# Altium PCB SlowDanceGift.PcbDoc
Units mm, origin at the board's own origin, x right, y up, seen from the top; angles counter-clockwise.
Board outline 57.5 x 36 mm, 2 copper layers (Top Layer, Bottom Layer); 69 components, 46 nets, 221 pads, 29 vias.
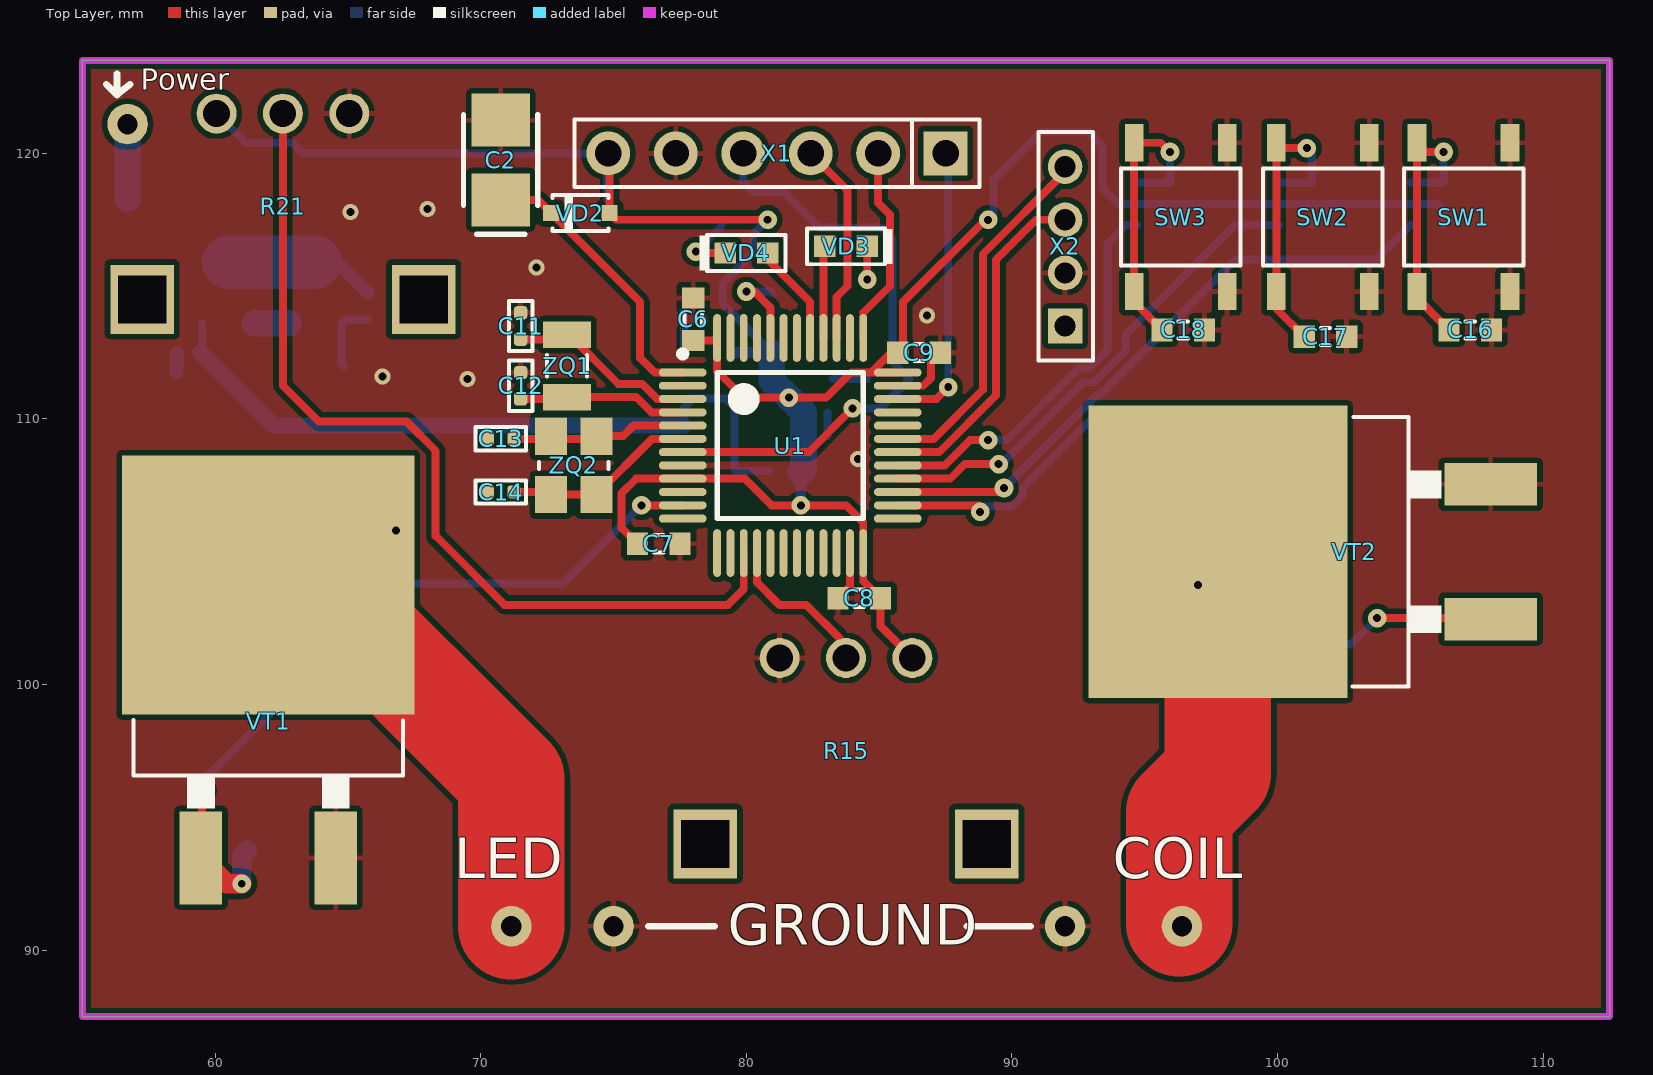
[diagram p0: Top Layer view]
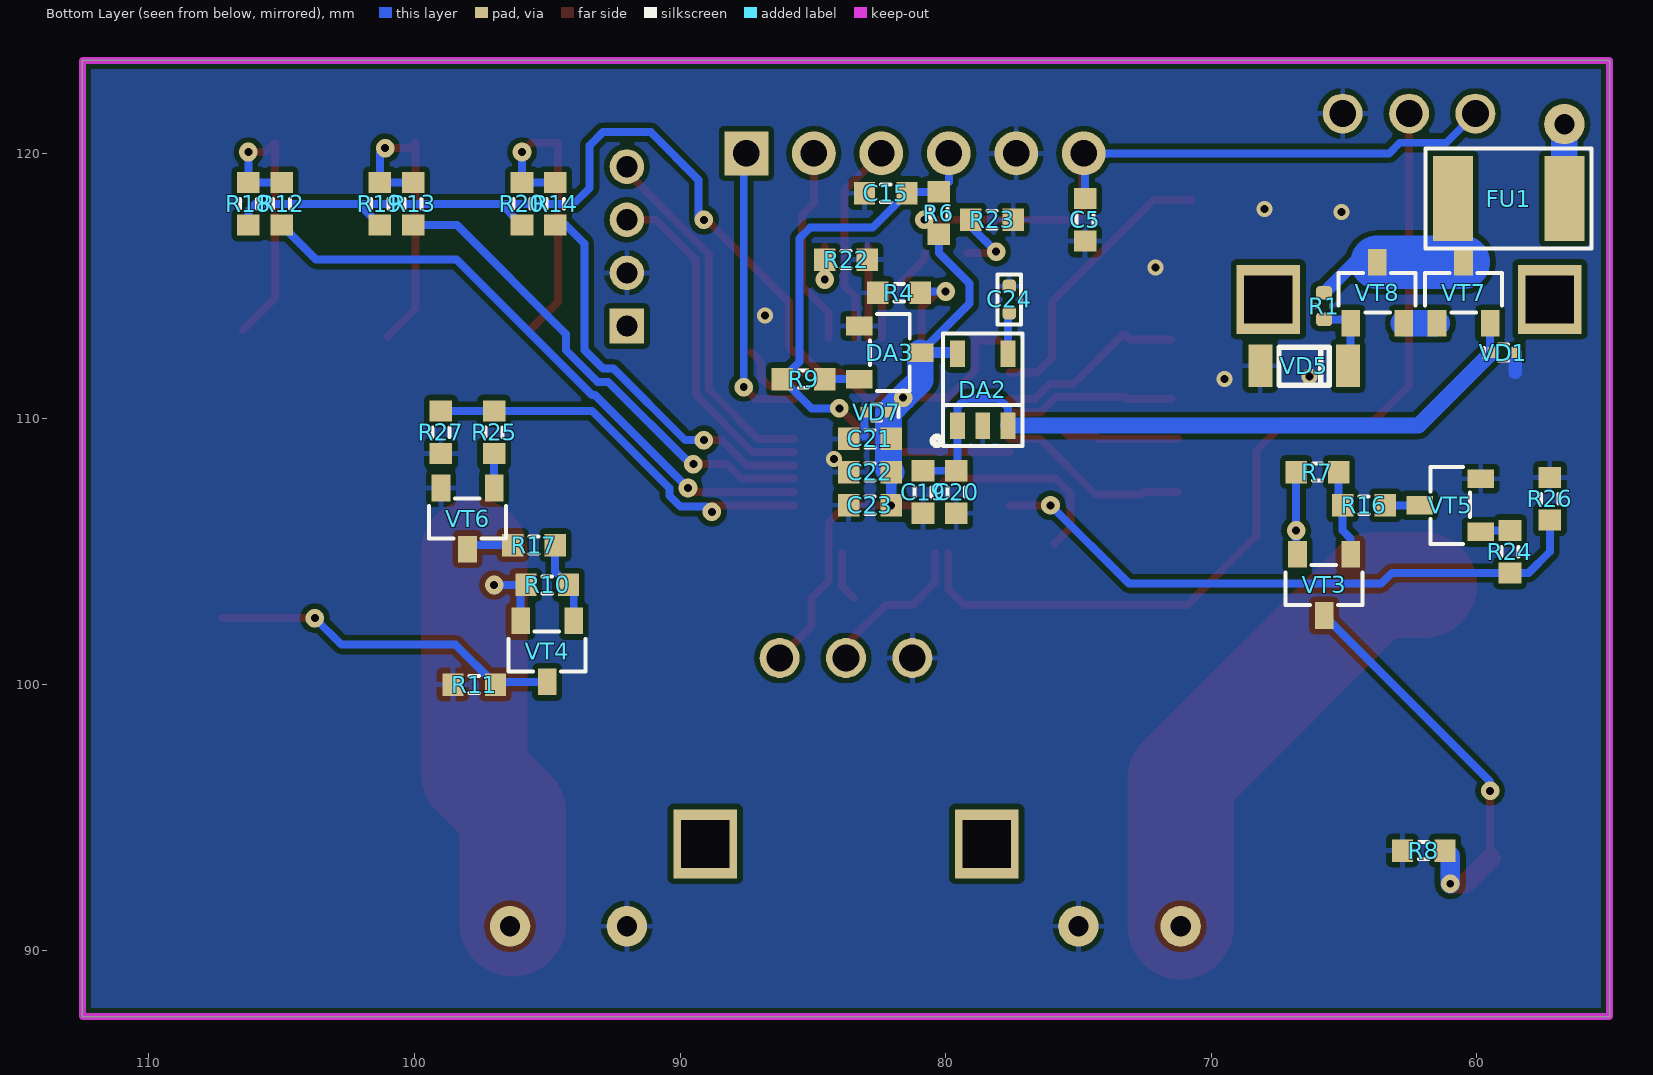
[diagram p1: Bottom Layer view, seen from below]
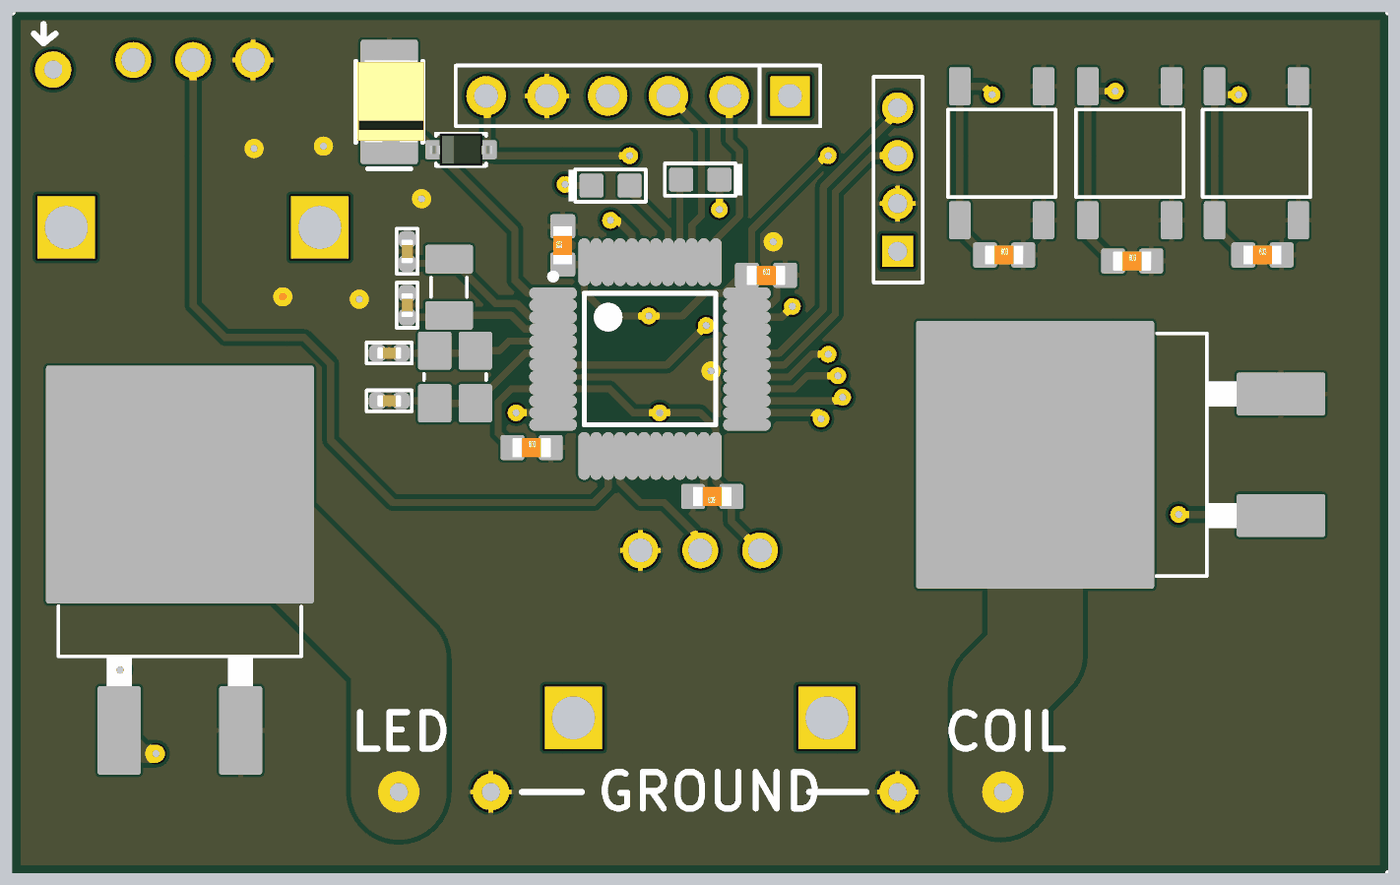
[diagram p2: 3D render of the assembled board from above, using the file's embedded part models]
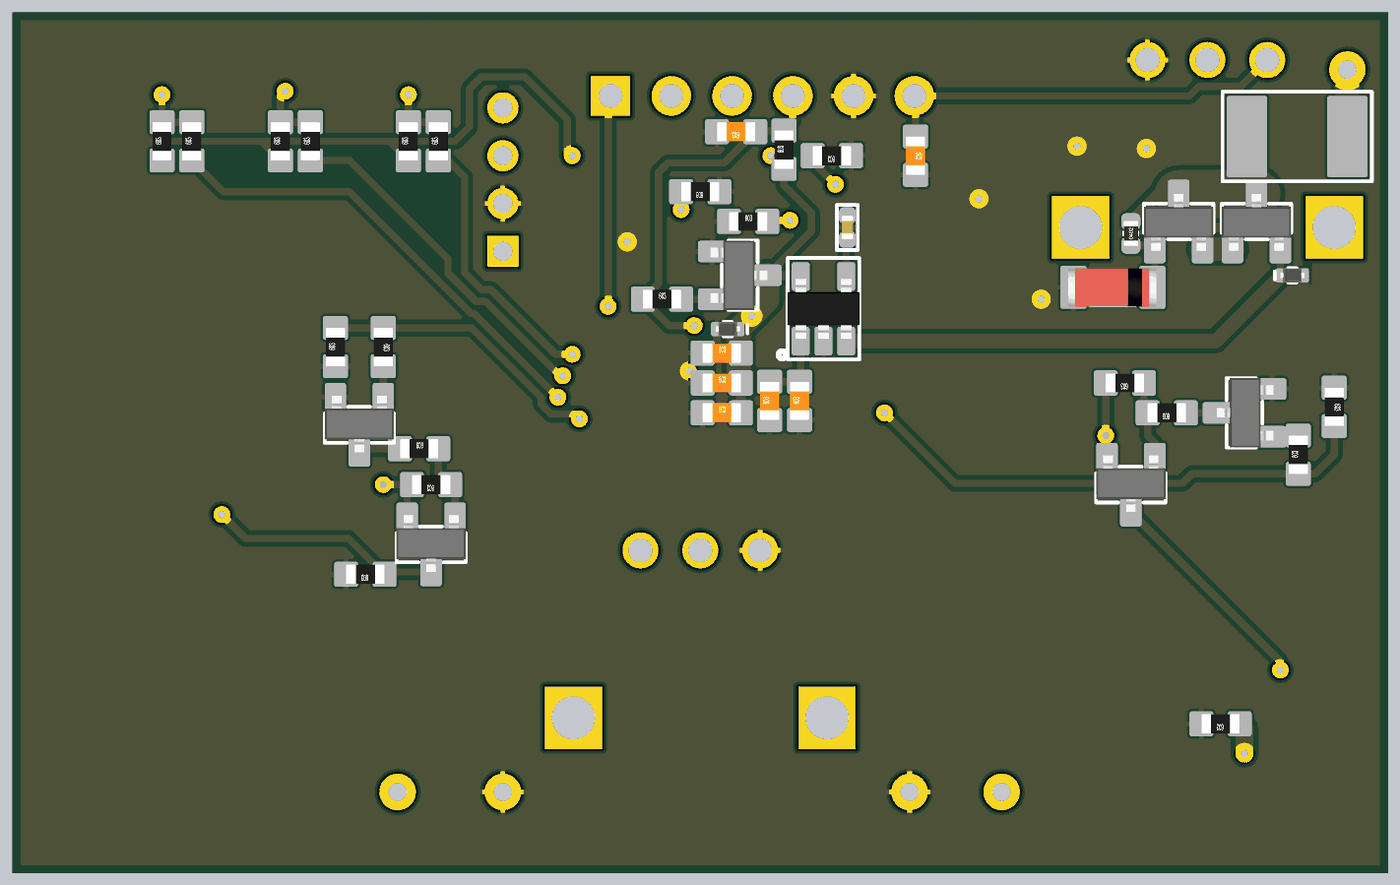
[diagram p3: 3D render of the assembled board from below, using the file's embedded part models]

## Layer stack, top to bottom
Top Solder: solder mask 0.0102, Solder Resist, Dk 3.5
Top Layer: signal copper 0.0356
Dielectric 1: dielectric 0.32, FR-4, Dk 4.8
Bottom Layer: signal copper 0.0356
Bottom Solder: solder mask 0.0102, Solder Resist, Dk 3.5

## Board outline
55,87.5 55,123.5 112.5,123.5 112.5,87.5

## Design rules (kind name [scope] priority, off if disabled: settings)
Clearance [All] p1: gap=0.2 ignorepadtopadclearanceinfootprint=FALSE except(0: Arc-Hole Track-Hole SMDPad-Hole THPad-Hole Via-Hole Fill-Hole Poly-Hole Region-Hole Text-Hole)
DiffPairsRouting [All] p1: maxlimit=0.254 minlimit=0.1 mostfreqgap=0.2 toplayer_minwidth=0.1 toplayer_maxwidth=0.381 toplayer_prefwidth=0.3 bottomlayer_minwidth=0.1 bottomlayer_maxwidth=0.381 bottomlayer_prefwidth=0.3 maxuncoupledlength=12.7
Height [All] p1: minheight=0 maxheight=30 prefheight=12.7
HoleSize [All] p1: absolutevalues=TRUE maxlimit=2.5 minlimit=0.025 maxpercent=80.000 minpercent=20.000
HoleToHoleClearance [All] p1: gap=0.2 allowstackedmicrovias=TRUE
MatchedLengths [InxSignalClass('All xSignals')] p1: tolerance=1 checknetsindiffpair=TRUE checkdiffpairvsdiffpair=FALSE checkxsignals=FALSE checkothers=FALSE
MinimumSolderMaskSliver [All] p1: minsoldermaskwidth=0.25
PasteMaskExpansion [All] p1: expansion=0.1
PlaneClearance [All] p1: clearance=0.5
PlaneConnect [All] p1: planeconnectstyle=Relief reliefexpansion=0.5 reliefentries=4 reliefconductorwidth=0.2 reliefairgap=0.2
PolygonConnect [All] p1: connectstyle=Relief reliefconductorwidth=0.2 reliefentries=4 polygonreliefangle="90 Angle" airgapwidth=0.2
RoutingVias [All] p1: holewidth=0.3 width=0.7 viastyle="Through Hole" minholewidth=0.3 minwidth=0.7 maxholewidth=0.3 maxwidth=0.7
SilkToSilkClearance [All] p1: silktosilkclearance=0.2
SilkToSolderMaskClearance [IsPad] p1: minsilkscreentomaskgap=0.2 clearancetoexposedcopper=TRUE
SolderMaskExpansion [All] p1: expansion=0.1
Width 3V3 [InNet('3V3')] p1: maxlimit=1 minlimit=0.2 preferedwidth=0.3
Width 5V [InNet('5V')] p2: maxlimit=3 minlimit=0.2 preferedwidth=0.6
Width [All] p3: maxlimit=4 minlimit=0.2 preferedwidth=0.3
20 further rules are at their usual default settings.

## Components (designator, comment, footprint, x,y, rotation, side; value= is the part's Value field where it differs from the comment)
C2 "Tann B 100 мкФ 6 В" CAP_POL_SIZE_B 70.75,119.75 r90 top value="100 мкФ"
C5 "C0603-X7R-50В-0.1мкФ" C0603_HD 74.75,117.5 r270 bottom value="0.1 мкФ"
C6 "C0603-X7R-50В-0.1мкФ" C0603_HD 78,113.75 r90 top value="0.1 мкФ"
C7 "C0603-X7R-50В-0.1мкФ" C0603_HD 76.7,105.3 r0 top value="0.1 мкФ"
C8 "C0603-X7R-50В-0.1мкФ" C0603_HD 84.25,103.25 r180 top value="0.1 мкФ"
C9 "C0603-X7R-50В-0.1мкФ" C0603_HD 86.5,112.5 r0 top value="0.1 мкФ"
C11 "C0402-X7R-16В-20pF-10%" C0402_HD 71.5,113.5 r270 top value=20пФ
C12 "C0402-X7R-16В-20pF-10%" C0402_HD 71.5,111.25 r270 top value=20пФ
C13 "C0402-X7R-16В-20pF-10%" C0402_HD 70.75,109.25 r0 top value=20пФ
C14 "C0402-X7R-16В-20pF-10%" C0402_HD 70.75,107.25 r0 top value=20пФ
C15 "C0603-X5R-16В-22нФ" C0603_HD 82.25,118.5 r0 bottom value=22нФ
C16 "C0603-X5R-16В-22нФ" C0603_HD 107.25,113.35 r0 top value=22нФ
C17 "C0603-X5R-16В-22нФ" C0603_HD 101.8,113.1 r0 top value=22нФ
C18 "C0603-X5R-16В-22нФ" C0603_HD 96.45,113.35 r0 top value=22нФ
C19 "C0603-X5R-16В-1мкФ" C0603_HD 80.85,107.25 r90 bottom value="1 мкФ"
C20 "C0603-X5R-16В-0.1мкФ" C0603_HD 79.6,107.25 r90 bottom value="0.1 мкФ"
C21 "C0603-X5R-16В-0.1мкФ" C0603_HD 82.85,109.25 r180 bottom value="0.1 мкФ"
C22 "C0603-X5R-16В-1мкФ" C0603_HD 82.85,108 r180 bottom value="1 мкФ"
C23 "C0603-X5R-16В-10мФ" C0603_HD 82.85,106.75 r180 bottom value=10мкФ
C24 "C0402-X7R-16В-10nF-10%" C0402_HD 77.6,114.5 r90 bottom value=10нФ
DA2 "LP2985-33DBV" "SOT-23-5 (TI)" 79.55,109.75 r180 bottom
DA3 "STM809SWX6F (ST)" SOT-23 82.1,112.5 r270 bottom
FU1 "MF-MSMF020/60-2" MF-MSMF020/60 56.7,118.3 r0 bottom
R1 "R0402-10кОм-5%" R0402_min 65.75,114.25 r90 bottom value=10кОм
R4 "R0603-10кОм-5%" R0603_HD 81.75,114.75 r180 bottom value="10 кОм"
R6 "R0603-100кОм-5%" R0603_HD 80.25,117.75 r90 bottom value="100 кОм"
R7 "R0603-100кОм-5%" R0603_HD 66,108 r0 bottom value=100кОм
R8 "R0603-100кОм-5%" R0603_HD 62,93.75 r0 bottom value=100кОм
R9 "R0603-1кОм-5%" R0603_HD 85.35,111.5 r180 bottom value="1 кОм"
R10 "R0603-100кОм-5%" R0603_HD 95,103.75 r0 bottom value=100кОм
R11 "R0603-100кОм-5%" R0603_HD 97.75,100 r0 bottom value=100кОм
R12 "R0603-1кОм-5%" R0603_HD 105,118.1 r90 bottom value="1 кОм"
R13 "R0603-1кОм-5%" R0603_HD 100.05,118.1 r90 bottom value="1 кОм"
R14 "R0603-1кОм-5%" R0603_HD 94.7,118.1 r90 bottom value="1 кОм"
R15 "R-0904N" R-0904N 83.25,96 r180 top
R16 "R0603-1кОм-5%" R0603_HD 64.25,106.75 r0 bottom value=1кОм
R17 "R0603-1кОм-5%" R0603_HD 95.5,105.25 r180 bottom value=1кОм
R18 "R0603-100кОм-5%" R0603_HD 106.25,118.1 r90 bottom value=100кОм
R19 "R0603-100кОм-5%" R0603_HD 101.3,118.1 r90 bottom value=100кОм
R20 "R0603-100кОм-5%" R0603_HD 95.95,118.1 r90 bottom value=100кОм
R21 "R-0904N" R-0904N 62.05,116.5 r180 top
R22 "R0603-100кОм-5%" R0603_HD 83.75,116 r0 bottom value=100кОм
R23 "R0603-100кОм-5%" R0603_HD 78.25,117.5 r0 bottom value=100кОм
R24 "R0603-300Ом-5%" R0603_HD 58.75,105 r90 bottom value=300Ом
R25 "R0603-300Ом-5%" R0603_HD 97,109.5 r270 bottom value=300Ом
R26 "R0603-100кОм-5%" R0603_HD 57.25,107 r270 bottom value=100кОм
R27 "R0603-100кОм-5%" R0603_HD 99,109.5 r90 bottom value=100кОм
SW1 "SWT-30" SWT-30 107,117.6 r90 top
SW2 "SWT-30" SWT-30 101.7,117.6 r90 top
SW3 "SWT-30" SWT-30 96.35,117.6 r90 top
U1 "STM32F103C6T6A" STM-LQFP48_N 81.65,109 r0 top
VD1 "ESD9L5.0ST5G" "SOD-923 (ON)"#1 59,112.5 r180 bottom
VD2 "BAS16HT1" "SOD323 (SC-76)" 73.75,117.75 r180 top
VD3 "KP1608ZGC" LED_0603 83.75,116.5 r0 top
VD4 "KP1608ZGC" LED_0603 80,116.25 r180 top
VD5 "BZV55-C5V6" sod80c 66.5,112 r180 bottom
VD7 "ESD9L3.3ST5G" "SOD-923 (ON)"#2 82.6,110.25 r0 bottom
VT1 "STB80N20M5" "D2PAK-2 (ST)" 62,93.575 r0 top
VT2 "STB80N20M5" "D2PAK-2 (ST)" 107.925,105 r90 top
VT3 "MMBTA92" SOT-23 65.75,103.75 r0 bottom
VT4 "MMBTA92" SOT-23 95,101.25 r0 bottom
VT5 "BC817" SOT-23 61,106.75 r90 bottom
VT6 "BC817" SOT-23 98,106.25 r0 bottom
VT7 "MMBTA42" SOT-23 60.5,114.75 r180 bottom
VT8 "MMBTA42" SOT-23 63.75,114.75 r180 bottom
X1 "n/m PLS-6" PLS-06 87.5,120 r180 top
X2 "n/m PLS-4" PLS2-4 92,113.5 r0 top
ZQ1 "DST310S 32.768 kHz, 20ppm, 50 kOhm, 7pF (1TJF0SPDJ1AI00D)" DST310S 73.25,112 r270 top value="32.768 кГц"
ZQ2 "DSX321G 12 MHz, 10ppm@25C, 20ppm@-40+85C, 80 Ohm, 12pF (1C212000AB0AB)" DSX321G 73.5,108.25 r90 top value="12 МГц"

## Footprints (in the part's own frame and the unit in brackets; to place one, negate y for a bottom-side part, rotate by r counter-clockwise, add the part's x,y. Pads: shape width x height; smd on the part's side, far side on the other; paste and mask are expansions set on the pad)
C0402_HD [mm]
  rrect50% 0.5x0.5 smd: 1(0.5,0) 2(-0.5,0)
  silkscreen extent -0.94,-0.44 0.94,0.44, body extent -0.5,-0.25 0.5,0.25, height 0.48
C0603_HD [mm]
  rect 0.8x0.85 smd: 1(-0.8,0) 2(0.8,0)
  silkscreen extent -0.18,-0.33 0.18,0.33, body extent -0.8,-0.4 0.8,0.4, height 0.3
CAP_POL_SIZE_B [mm]
  rect 2x2.2 smd: 1(-1.5,0) 2(1.5,0)
  silkscreen extent -2.8,-1.4 1.7,1.4, body extent -1.72,-1.47 1.77,1.33, height 1.91
"D2PAK-2 (ST)" [mm]
  rect 1.6x3.5 smd: 1(-2.54,-0.1) 3(2.54,-0.1)
  rect 11x9.75 smd: 2(0,10.175)
  silkscreen extent -5.07,1.75 5.07,5.1, body extent -5.08,-1.24 5.08,12.99, height 4.87
DST310S [mm]
  rect 1x1.8 smd: 1(-1.175,0) 2(1.175,0)
  silkscreen extent -0.4,-0.75 0.4,0.75, body extent -1.6,-0.75 1.6,0.75, height 0.85
DSX321G [mm]
  rect 1.4x1.2 smd: 1(-1.1,-0.85) 2(1.1,-0.85) 3(1.1,0.85) 4(-1.1,0.85)
  silkscreen extent -0.13,-1.3 0.13,1.3, body extent -1.6,-1.3 1.6,1.3, height 1
LED_0603 [mm]
  rect 0.8x0.8 smd: 1(-0.8,0) 2(0.8,0)
  silkscreen extent -1.47,-0.67 1.75,0.67, body extent -0.8,-0.4 0.8,0.4, height 1.1
MF-MSMF020/60 [mm]
  rect 1.5x3.2 smd: 1(0,0) 2(4.2,0)
  silkscreen extent -1.02,-1.88 5.23,1.88, body extent -0.63,-1.7 4.83,1.7, height 1
PLS2-4 [mm]
  rect 1.3x1.3 hole 0.8: 1(0,0)
  round 1.3 hole 0.8: 2(0,2) 3(0,4) 4(0,6)
  silkscreen extent -1,-1.3 1.05,7.3
PLS-06 [mm]
  rect 1.65x1.65 hole 1: 1(0,0)
  round 1.65 hole 1: 2(2.54,0) 3(5.08,0) 4(7.62,0) 5(10.16,0) 6(12.7,0)
  silkscreen extent -1.27,-1.27 13.97,1.27
R0402_min [mm]
  rrect50% 0.5x0.6 smd: 1(-0.5,0) 2(0.5,0)
  silkscreen extent -0.1,-0.35 0.1,0.35, body extent -0.52,-0.3 0.52,0.3, height 0.34
R0603_HD [mm]
  rect 0.8x0.85 smd: 1(-0.8,0) 2(0.8,0)
  silkscreen extent -0.18,-0.33 0.18,0.33, body extent -0.8,-0.4 0.8,0.4, height 0.3
R-0904N [mm] "R-0904N-A100K (РП1-74), L25KQ 100 кОм, Резистор переменный"
  round 1.5 hole 1: 1(-3,-5) 2(-0.5,-5) 3(2,-5)
  rect 2.4x2.6 hole 1.8 square: ""(-5.8,2) ""(4.8,2)
sod80c [mm]
  rect 0.9x1.6 smd: 1(-1.65,0) 2(1.65,0)
  silkscreen extent -0.95,-0.72 0.95,0.7, body extent -1.88,-0.81 1.82,0.79, height 1.61
"SOD323 (SC-76)" [mm]
  rect 0.6x0.6 smd: 1(-1.1,0) 2(1.1,0)
  silkscreen extent -1.05,-0.75 1.05,0.67, body extent -1.3,-0.68 1.3,0.68, height 1.1
"SOD-923 (ON)"#1 [mm]
  rect 0.3x0.4 smd mask+0.05: 1(-0.45,0) 2(0.45,0)
  Top Layer pour cut-out: 0.075,0.375 0.825,0.375 0.825,-0.375 0.075,-0.375
  Top Layer pour cut-out: -0.075,-0.375 -0.825,-0.375 -0.825,0.375 -0.075,0.375
  silkscreen extent -0.73,-0.3 0.18,0.3, body extent -0.5,-0.3 0.5,0.3, height 0.4
"SOD-923 (ON)"#2 [mm]
  rect 0.3x0.4 smd: 1(-0.45,0) 2(0.45,0)
  silkscreen extent -0.82,-0.3 0.18,0.3, body extent -0.5,-0.3 0.5,0.3, height 0.4
SOT-23 [mm]
  rect 0.7x1 smd: 1(-1,-1.15) 2(1,-1.15) 3(0,1.15)
  silkscreen extent -1.45,-0.75 1.45,0.75, body extent -1.45,-1.22 1.45,1.15, height 1
"SOT-23-5 (TI)" [mm]
  rect 0.55x1 smd: 1(0,0) 2(0.95,0) 3(1.9,0) 4(1.9,2.7) 5(0,2.7)
  silkscreen extent -0.93,-0.77 2.45,3.47, body extent -0.55,0.1 2.45,2.6, height 1.05
STM-LQFP48_N [mm] "QFP, 48-Leads, Body 7x7mm, Pitch 0.5mm, IPC Medium Density"
  oval 1.8x0.3 smd: 1(-4.05,2.75) 2(-4.05,2.25) 3(-4.05,1.75) 4(-4.05,1.25) 5(-4.05,0.75) 6(-4.05,0.25) 7(-4.05,-0.25) 8(-4.05,-0.75) 9(-4.05,-1.25) 10(-4.05,-1.75) 11(-4.05,-2.25) 12(-4.05,-2.75) 25(4.05,-2.75) 26(4.05,-2.25) 27(4.05,-1.75) 28(4.05,-1.25) 29(4.05,-0.75) 30(4.05,-0.25) 31(4.05,0.25) 32(4.05,0.75) 33(4.05,1.25) 34(4.05,1.75) 35(4.05,2.25) 36(4.05,2.75)
  oval 0.3x1.8 smd: 13(-2.75,-4.05) 14(-2.25,-4.05) 15(-1.75,-4.05) 16(-1.25,-4.05) 17(-0.75,-4.05) 18(-0.25,-4.05) 19(0.25,-4.05) 20(0.75,-4.05) 21(1.25,-4.05) 22(1.75,-4.05) 23(2.25,-4.05) 24(2.75,-4.05) 37(2.75,4.05) 38(2.25,4.05) 39(1.75,4.05) 40(1.25,4.05) 41(0.75,4.05) 42(0.25,4.05) 43(-0.25,4.05) 44(-0.75,4.05) 45(-1.25,4.05) 46(-1.75,4.05) 47(-2.25,4.05) 48(-2.75,4.05)
  silkscreen extent -4.17,-2.75 2.75,3.57, body extent -3.5,-3.5 3.5,3.5, height 1.6
SWT-30 [mm]
  rect 1.4x0.7 smd: 1(-2.8,-1.75) 1(2.8,-1.75) 2(-2.8,1.75) 2(2.8,1.75)
  silkscreen extent -1.83,-2.25 1.83,2.25, body extent -1.83,-2.25 1.83,2.25, height 1.5

## Part data
C2: library part CAP_TANT_B
C5 C6 C7 C8 C9: library part C0603
C11 C12 C13 C14 C24: library part C0402
C15 C16 C17 C18 C19 C20 C21 C22 C23: library part C0603_HD
DA2: library part LP2985-xxDBV
DA3: library part LM809M3-2.93
FU1: library part MF-MSMF
R1: library part R0402
R4 R6 R7 R8 R9 R10 R11 R12 R13 R14 R16 R17 R18 R19 R20 R22 R23 R24 R25 R26 R27: library part R0603
R15 R21: "R-0904N-A100K resistor 500omh-100komh", Max value=100кОм, Min value=500Ом, Rated power=50mW, Tolerance=20%, Rot.angle="280 +- 10"
U1: "ARM Cortex-M3 32-bit MCU, 32 KB Flash, 10 KB Internal RAM, 37 I/Os, 48-pin LQFP, -40 to 85 degC, Tray", I/Os (High Current)=37, Operating Frequency(F) (Processor speed) (MHz)=72, Supplier Part Number 1=497-11515-ND, Supply Voltage(Vcc) min (V)=2, A/D Converter="2x12-bit (10 Channel)", ComponentLink1Description="Manufacturer URL", ComponentLink1URL=http://www.st.com/web/en/home.html, ComponentLink2Description=Datasheet, ComponentLink2URL=http://www.st.com/st-web-ui/static/active/en/resource/technical/document/datasheet/CD00210843.pdf, ComponentLink3Description="Package Specification", ComponentLink3URL=http://www.st.com/st-web-ui/static/active/en/resource/technical/document/datasheet/DM00058181.pdf, Core="ARM Cortex-M3", DatasheetVersion="Rev. 6", FLASH Size (Prog) (kB)=32, Internal RAM Size (kB)=10, Mounting Technology="Surface Mount", PackageDescription="48-Pin Low Profile Quad Flat Package, 7 x 7 mm Body, 0.5 mm Pitch", PackageReference=LQFP48, PackageVersion="Rev. 6, 06/2013", Packing=Tray, PartNumber=STM32F103C6T6A, Supplier 1=Digi-Key, Supplier 2=Farnell, Supplier 3=Newark, Supplier 4=Newark, Supplier 5=Mouser, Supplier Part Number 2=1972391, Supplier Part Number 3=72T2643, Supplier Part Number 4=57P1219, Supplier Part Number 5=511-STM32F103C6T6A
VD2: library part BAS16H
VD3 VD4: library part LED_0603
VD5: library part BZV55
VT3 VT4: library part MMBT5401
VT7 VT8: library part MMBT5551
X1: library part PLS-6
X2: library part PLS2-4
ZQ2: library part DSX321G

## Free pads (board coordinates)
  round 1.524 hole 0.762: 2(56.7,121.1) 3(71.15,90.9) 4(96.4,90.9) 5(75,90.9) 5(92,90.9)

## Via types
v1: diameter 0.7, hole 0.3, Top Layer to Bottom Layer, 22 vias
v2: diameter 0.6, hole 0.3, Top Layer to Bottom Layer, 7 vias

## Nets (pads, with @x,y where several pads share a name; then routed paths per layer and width w, separated by ;. In a path a pad name is that pad's centre, name@x,y a point inside that pad or via, vN(x,y) a via of type N, cw(c..) or ccw(c..) an arc to the next point about the centre after c; other vN are vias at no path point)
3V3: C5.1 C6.1 C7.1 C8.1 C9.1 C21.2 C22.2 C23.2 DA2.5 DA3.3 R6.1 R15.1 R18.1 R19.1 R20.1 R21.3 U1.9 U1.24 U1.36 U1.48 VD2.1 VD7.1 X1.6 | length 99.6
  Top Layer w0.3: X1.6 74.85,119.95 VD2.1 75.1,117.5 v1(80.8,117.5) ; C7.1 75.3,105.9 75.3,107.2 75.85,107.75 U1.9 79.95,107.75 80.95,106.75 v1(82.05,106.75) 83.75,106.75 84.4,106.1 U1.24 84.4,103.9 C8.1 85.05,102.2 R15.1 ; C6.1 78.8,112.95 U1.48 78.9,111.8 79.9,110.8 v1(81.6,110.8) 83,110.8 83.95,111.75 84.7,111.75 ; U1.36 84.7,111.75 ; v1(89.1,117.5) 89,117.5 85.9,114.4 85.9,112.7 C9.1 85.45,112.5 84.7,111.75
  Bottom Layer w0.3: R21.3 61.15,120.4 62.9,120.4 63.3,120 X1.6 74.75,119.95 C5.1 ; v1(80.8,117.5) R6.1 80.25,116.25 79.1,115.1 79.1,114.35 DA3.3 ; v1(89.1,117.5) 89.3,117.5 89.3,119 91.1,120.8 92.9,120.8 93.4,120.3 93.4,118.7 94,118.1 96.75,118.1 ; R20.1 96.75,118.1 ; R19.1 102.1,118.1 ; R18.1 106.25,117.85 106,118.1 102.1,118.1 ; 96.75,118.1 102.1,118.1
  Bottom Layer w0.4: DA2.5 79.6,112.5 DA3.3 ; v1(82.05,106.75) C22.2
  Bottom Layer w1: DA3.3 80.95,111.45 v1(81.6,110.8) VD7.1 82.15,108.1 C22.2
5V: C19.2 C20.2 DA2.1 DA2.3 VD1.1 VT7.2 | length 27
  Bottom Layer w0.3: VD1.1 59.5,112.55 VT7.2 ; DA2.3 77.65,110.425 78,110.775 79.225,110.775 79.55,110.45 DA2.1 79.55,108.1 C20.2 C19.2
  Bottom Layer w0.6: VD1.1 62.2,109.75 DA2.3
+12В: X2.1
GND: C2.2 C5.2 C6.2 C7.2 C8.2 C9.2 C11.2 C12.2 C13.2 C14.2 C15.2 C16.2 C17.2 C18.2 C19.1 C20.1 C21.1 C22.1 C23.1 C24.1 DA2.2 DA3.1 pad.5 R4.1 R8.2 R11.2 R15.3 R21.1 R22.1 R23.1 R26.1 R27.1 SW1.1 SW2.1 SW3.1 U1.8 U1.23 U1.35 U1.47 VD1.2 VD5.1 VD7.2 VT1.3 VT2.3 VT5.2 VT6.2 X1.5 X2.2 | length 6
  Top Layer w0.3: C8.2 83.9,103.7 U1.23 ; U1.35 86.657,111.25 86.95,111.543 86.95,112.15 C9.2
  Bottom Layer w0.3: 83.05,109.354 VD7.2
  Bottom Layer w0.5: 58.55,111.75 VD1.2
  other v2: 84.2,108.5 69.5,111.5 66.3,111.6 86.8,113.9 72.1,115.7 65.1,117.8 68,117.9
NetC2_1: C2.1 U1.1 VD2.2 | length 10.8
  Top Layer w0.3: C2.1 72.15,118.25 VD2.2 76,114.4 76,112.3 76.55,111.75 U1.1
NetC11_1: C11.1 U1.3 ZQ1.1 | length 7.2
  Top Layer w0.3: C11.1 73.075,113 ZQ1.1 73.325,113.175 75.175,111.325 76.068,111.325 76.633,110.76 76.633,110.75 U1.3
NetC12_1: C12.1 U1.4 ZQ1.2 | length 6.4
  Top Layer w0.3: C12.1 73.175,110.75 ZQ1.2 75.851,110.825 76.426,110.25 U1.4
NetC13_1: C13.1 U1.5 ZQ2.2 ZQ2.3 | length 6.6
  Top Layer w0.3: C13.1 74.25,109.25 ZQ2.2 75.35,109.35 75.75,109.75 U1.5
NetC14_1: C14.1 U1.6 ZQ2.1 ZQ2.4 | length 7.3
  Top Layer w0.3: C14.1 72.55,107.25 ZQ2.4 ZQ2.1 76.45,109.25 U1.6
NetC16_1: C16.1 R12.2 R18.2 SW1.2 | length 11.1
  Top Layer w0.3: v1(106.25,120.05) 105.6,120.05 105.25,120.4 105.25,114.8 105.25,114.55 C16.1
  Bottom Layer w0.3: R12.2 R18.2 v1(106.25,120.05)
NetC17_1: C17.1 R13.2 R19.2 SW2.2 | length 11.6
  Top Layer w0.3: C17.1 99.95,114.15 99.95,114.8 99.95,120.4 100.15,120.2 v1(101.1,120.2)
  Bottom Layer w0.3: R13.2 R19.2 101.3,120 v1(101.1,120.2)
NetC18_1: C18.1 R14.2 R20.2 SW3.2 | length 11.4
  Top Layer w0.3: C18.1 94.6,114.4 94.6,114.8 94.6,120.4 95.6,120.4 v1(95.95,120.05)
  Bottom Layer w0.3: R14.2 R20.2 v1(95.95,120.05)
NetC24_2: C24.2 DA2.4 | length 1.6
  Bottom Layer w0.3: C24.2 77.65,113.95 DA2.4
NetDA3_2: DA3.2 R9.2 | length 1.3
  Bottom Layer w0.3: DA3.2 R9.2
NetFU1_2: FU1.2 R1.2 VT7.3 VT8.3 | length 5.7
  Bottom Layer w0.5: VT8.3 64.6,115.9 R1.2
  Bottom Layer w2: VT7.3 VT8.3
NetR1_1: R1.1 VD5.2 VT8.1 | length 2.7
  Bottom Layer w0.3: VD5.2 64.75,112.1 VT8.1 64.9,113.75 R1.1
NetR4_2: R4.2 U1.44 | length 3.3
  Top Layer w0.3: v1(80,114.8) 80.3,114.8 80.9,114.2 U1.44
  Bottom Layer w0.3: v1(80,114.8) 80.9,114.8 R4.2
NetR7_1: R7.1 R16.2 VT3.1 | length 3.3
  Bottom Layer w0.3: VT3.1 64.75,105.5 65.05,105.8 R16.2 65.2,106.9 R7.1
NetR7_2: pad.3 R7.2 VT1.2 VT3.2 | length 20.8
  Top Layer w4: VT1.2 63.85,103.75 71.15,96.45 pad.3
  Bottom Layer w0.3: VT3.2 66.8,104.95 v1(66.8,105.8) R7.2
NetR8_1: R8.1 VT1.1 VT3.3 | length 15
  Top Layer w0.3: VT1.1 59.5,93.515 v1(59.5,96)
  Top Layer w0.75: VT1.1 60.435,92.5 v1(61,92.5)
  Bottom Layer w0.3: v1(59.5,96) 59.5,96.35 VT3.3
  Bottom Layer w0.75: v1(61,92.5) 61,93.55 R8.1
NetR10_1: R10.1 R17.2 VT4.1 | length 3.1
  Bottom Layer w0.3: VT4.1 94,103.55 R10.1 94.7,104.25 R17.2
NetR10_2: pad.4 R10.2 VT2.2 VT4.2 | length 17.2
  Top Layer w4: pad.4@96.3,91 96.3,95.2 97.75,96.65 VT2.2
  Bottom Layer w0.3: VT4.2 96,103.55 R10.2 v1(97,103.75)
NetR11_1: R11.1 VT2.1 VT4.3 | length 13.3
  Top Layer w0.3: v1(103.75,102.5) VT2.1@107.25,102.5
  Bottom Layer w0.3: VT4.3 96.85,100.1 R11.1 98.45,101.5 102.75,101.5 v1(103.75,102.5)
NetR12_1: R12.1 U1.27 | length 23.5
  Top Layer w0.3: U1.27 89.55,107.25 v1(89.7,107.4)
  Bottom Layer w0.3: v1(89.7,107.4) 93.2,110.9 93.314,110.9 98.414,116 103.7,116 R12.1
NetR13_1: R13.1 U1.28 | length 18.7
  Top Layer w0.3: U1.28 87.671,107.75 88.221,108.3 v1(89.5,108.3)
  Bottom Layer w0.3: v1(89.5,108.3) 89.607,108.3 92.707,111.4 93.107,111.4 94.3,112.593 94.3,113.2 98.4,117.3 R13.1
NetR14_1: R14.1 U1.29 | length 15.1
  Top Layer w0.3: U1.29 87.464,108.25 88.414,109.2 v1(89.1,109.2)
  Bottom Layer w0.3: v1(89.1,109.2) 89.8,109.2 92.5,111.9 92.9,111.9 93.6,112.6 93.6,116.6 94.3,117.3 R14.1
NetR15_2: R15.2 U1.16 | length 5.9
  Top Layer w0.3: U1.16 80.4,103.85 81.25,103 82.25,103 83.5,101.75 83.5,101.25 R15.2
NetR16_1: R16.1 VT5.3 | length 1.3
  Bottom Layer w0.3: VT5.3 R16.1
NetR17_1: R17.1 VT6.3 | length 1.8
  Bottom Layer w0.3: R17.1 97.85,105.25 VT6.3
NetR21_2: R21.2 U1.15 | length 34.5
  Top Layer w0.3: R21.2 62.55,111.25 63.9,109.9 67.2,109.9 68.3,108.8 68.3,105.6 70.9,103 79.3,103 79.9,103.6 U1.15
NetR22_2: R22.2 VD3.2 | length 2
  Top Layer w0.3: v1(84.55,115.25) VD3.2
  Bottom Layer w0.3: v1(84.55,115.25) R22.2
NetR23_2: R23.2 VD4.2 | length 2.7
  Top Layer w0.3: v1(78.1,116.3) 78.15,116.25 VD4.2
  Bottom Layer w0.3: v1(78.1,116.3) 79.05,117.25 R23.2
NetR24_1: R24.1 R26.2 U1.11 | length 23.3
  Top Layer w0.3: v1(76.05,106.75) U1.11
  Bottom Layer w0.3: R26.2 57.25,105 58.05,104.2 R24.1 63.2,104.2 63.6,103.8 73.1,103.8 v1(76.05,106.75)
NetR24_2: R24.2 VT5.1 | length 1.1
  Bottom Layer w0.3: R24.2 59.8,105.8 VT5.1
NetR25_1: R25.1 R27.2 U1.26 | length 15.3
  Top Layer w0.3: U1.26 88.75,106.75 88.8,106.7 v1(88.8,106.5)
  Bottom Layer w0.3: v1(88.8,106.5) 89,106.7 89.99,106.7 90.4,107.11 90.4,107.393 93.307,110.3 R25.1 R27.2
NetR25_2: R25.2 VT6.1 | length 1.3
  Bottom Layer w0.3: VT6.1 R25.2
NetU1_30: U1.30 X2.3 | length 12.9
  Top Layer w0.3: U1.30 87.257,108.75 89.4,110.893 89.4,115.993 90.907,117.5 X2.3
NetU1_31: U1.31 X2.4 | length 13.7
  Top Layer w0.3: U1.31 87.05,109.25 88.9,111.1 88.9,116.2 92,119.3 X2.4
NetU1_34: U1.34 X1.1 | length 10.9
  Top Layer w0.3: U1.34 87.15,110.75 v1(87.6,111.2)
  Bottom Layer w0.3: X1.1 87.6,119.9 v1(87.6,111.2)
NetU1_37: U1.37 X1.2 | length 7.5
  Top Layer w0.3: U1.37 84.4,114 85.4,115 85.4,117.7 84.96,118.14 X1.2
NetU1_39: U1.39 X1.3 | length 7.7
  Top Layer w0.3: X1.3 83.8,118.62 83.8,115 83.4,114.6 U1.39
NetU1_40: U1.40 VD3.1 | length 3.5
  Top Layer w0.3: U1.40 82.9,116.45 VD3.1
NetU1_41: U1.41 VD4.1 | length 3.9
  Top Layer w0.3: VD4.1 80.8,116 82.4,114.4 U1.41
NetVT7_1: VT7.1 VT8.2 | length 1.2
  Bottom Layer w1: VT7.1 VT8.2
Power: FU1.1 pad.2 | length 2.8
  Bottom Layer w1: FU1.1 pad.2
Reset: C15.1 R6.2 R9.1 U1.7 X1.4 | length 22.8
  Top Layer w0.3: U1.7 82.35,108.75 v1(84,110.4)
  Bottom Layer w0.3: X1.4 79.88,118.92 R6.2 81.4,118.55 C15.1 82.75,117.2 85.1,117.2 85.5,116.8 85.5,112.15 R9.1 85.05,110.4 v1(84,110.4)
pads on no net: R15. R21. U1.2 U1.10 U1.12 U1.13 U1.14 U1.17 U1.18 U1.19 U1.20 U1.21 U1.22 U1.25 U1.32 U1.33 U1.38 U1.42 U1.43 U1.45 U1.46

## Polygon pours and split planes (outlines as drawn)
GND on Top Layer "Bottom Layer-GND" (solid, remove dead copper, pour order 0): 55.1,123.5 112.3,123.5 112.3,87.5 55.1,87.5
GND on Bottom Layer "Bottom Layer-GND" (solid, remove dead copper, pour order 2): 55.1,123.5 112.4,123.5 112.4,87.5 55.1,87.5

## Keep-outs
Keep-Out Layer:
  the board outline again, w0.254

## Silkscreen, mask and mechanical layers (free items; w line width, h text height)
Top Overlay:
  lines w0.254: 55.9,122.6 56.3,122.2 ; 56.3,123 56.3,122.2 ; 56.8,122.6 56.3,122.2 ; 76.3,90.9 78.8,90.9 ; 88.3,90.9 90.7,90.9
  text "Power" at 57.2,122.4 h0.8
  text "LED" at 69,92.7 h1.52
  text "COIL" at 93.8,92.7 h1.52
  text "GROUND" at 79.3,90.2 h1.52

## Dimensions
112.5,87.5 to 112.5,123.5 on Top Overlay
112.5,123.5 to 55,123.5 on Top Overlay